# EAGLE board TopLayer1050 (EAGLE 7.2.0)
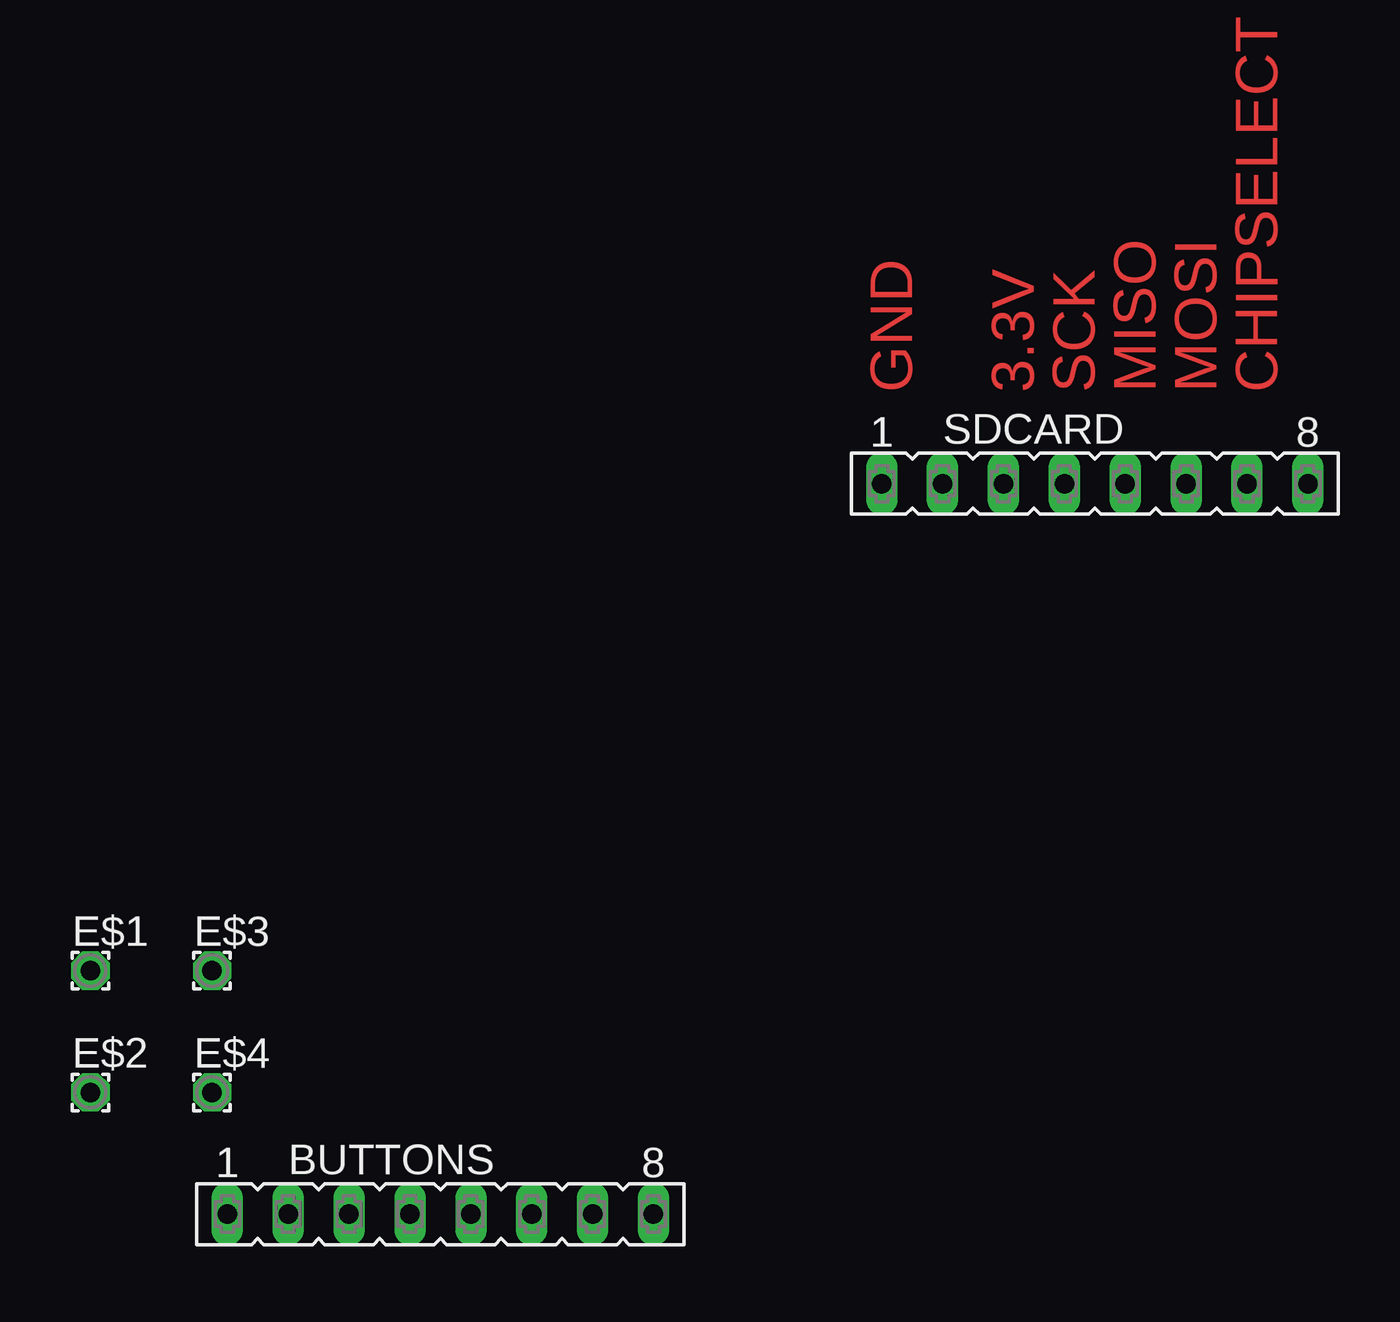
[diagram p0: board, top side]
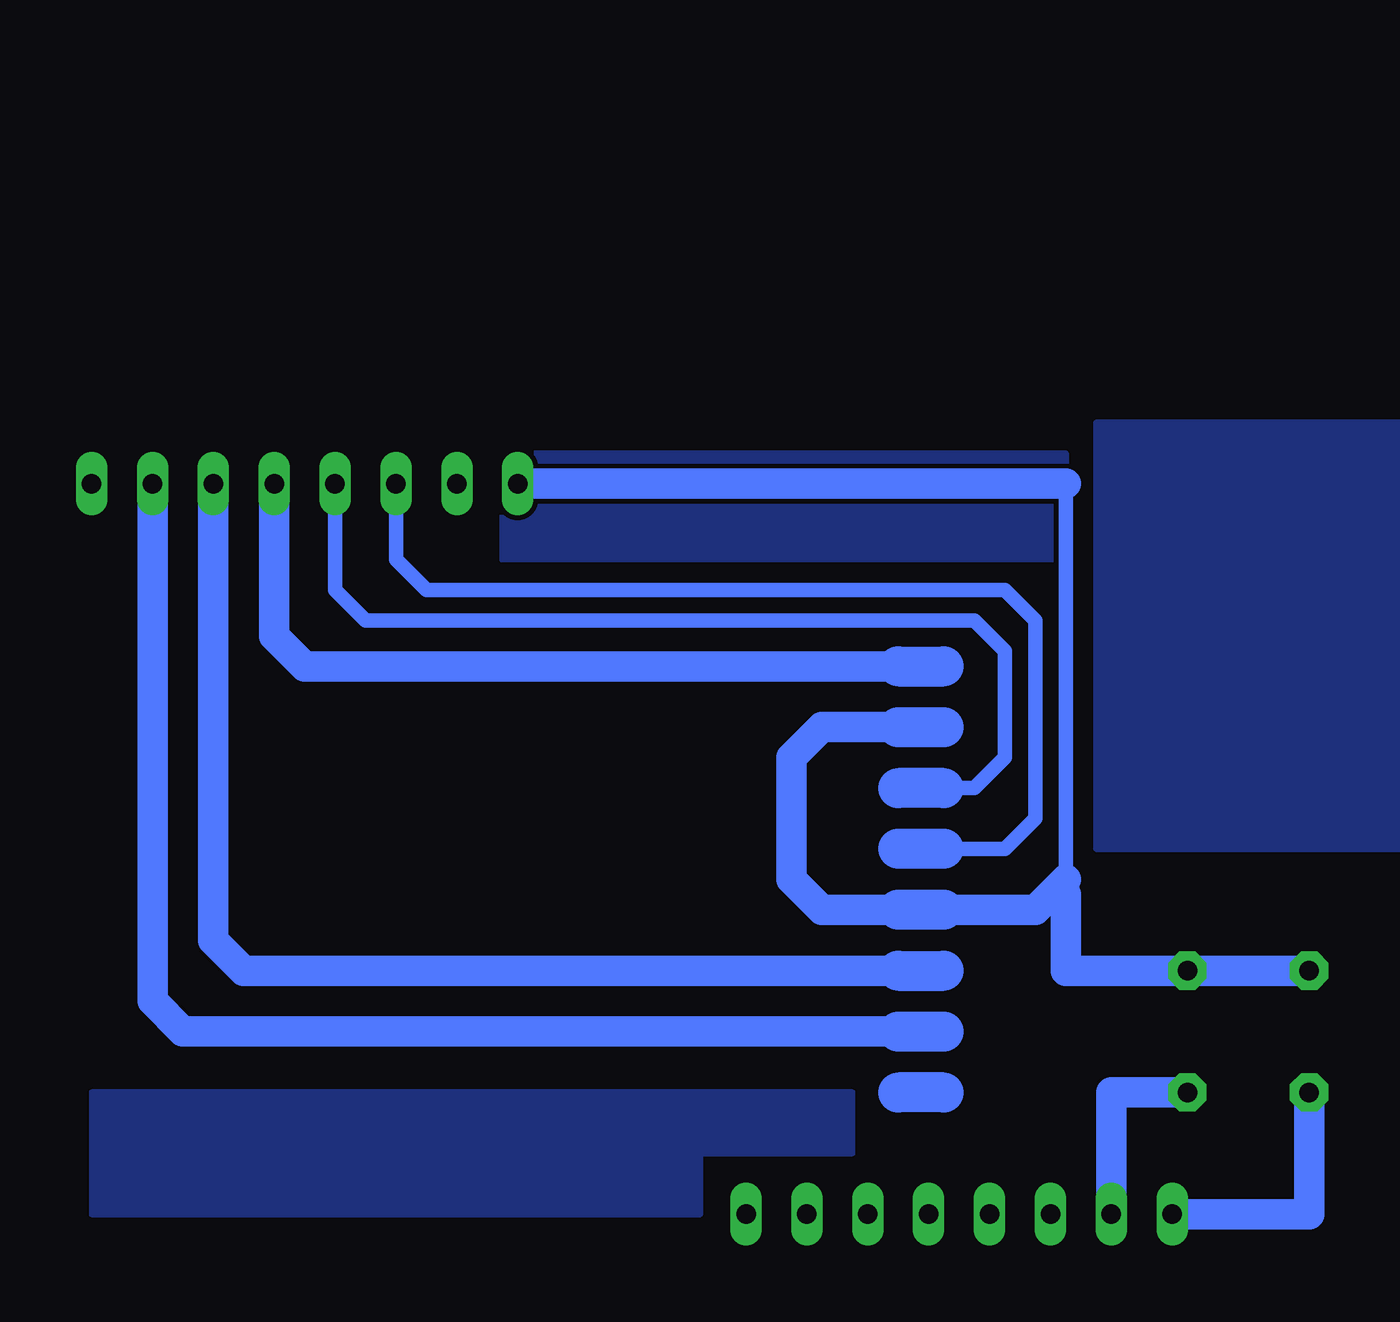
[diagram p1: board, bottom side, seen from below]

No outline drawn. Coordinates in mm, seen from the top.
Copper layers (1*16): Top 0.035mm / dielectric 1.5mm / Bottom 0.035mm
Design rules "default": minimum track width 10mil, minimum drill 24mil, track to track 8mil, track to pad 8mil, pad to pad 8mil, via to via 8mil, smd to smd 8mil, copper to edge 40mil, drill to drill 8mil, minimum pad ring 10mil, minimum via ring 8mil, stop-mask expansion 4mil, vias tented up to drill 0mil, thermal gap 10mil

## Footprints (pad centres in the part's own frame; a part is rotated, then mirrored left to right if it is on the bottom)
FE08 = drill 0.813 long: 1 -8.89,0; 2 -6.35,0; 3 -3.81,0; 4 -1.27,0; 5 1.27,0; 6 3.81,0; 7 6.35,0; 8 8.89,0
1,6/0,8 = drill 0.813 pad 1.6 octagon: 1 0,0

## Placement (x,y rotation side)
BUTTONS  [FE08]  19.68,2.54 0 top
E$1  [1,6/0,8]  5.08,12.7 0 top
E$2  [1,6/0,8]  5.08,7.62 0 top
E$3  [1,6/0,8]  10.16,12.7 0 top
E$4  [1,6/0,8]  10.16,7.62 0 top
SDCARD  [FE08]  46.99,33.02 0 top

## Library data of the parts
BUTTONS SDCARD = con-lsta
E$1-E$4 = wirepad

## Nets
S$1: SDCARD.7
S$3: BUTTONS.2 E$4.1
S$4: BUTTONS.1 E$2.1
S$10: SDCARD.6
S$11: SDCARD.5
S$12: SDCARD.4
S$13: SDCARD.3
S$15: E$1.1 E$3.1 SDCARD.1

## Tracks (layer width: path | path; a pad name or v marks a point on that pad's centre or on a via)
S$1
  Bottom 1.27: 22.23,10.16 52.07,10.16 53.34,11.43 SDCARD.7
  Bottom 1.676: 22.23,10.16 20.32,10.16
S$3
  Bottom 1.27: BUTTONS.2 13.34,7.62 E$4.1
S$4
  Bottom 1.27: BUTTONS.1 5.08,2.54 E$2.1
S$7
  Bottom 1.676: 20.32,7.62 22.23,7.62
S$10
  Bottom 1.27: 22.23,12.7 49.53,12.7 50.8,13.97 SDCARD.6
  Bottom 1.676: 22.23,12.7 20.32,12.7
S$11
  Bottom 1.27: SDCARD.5 48.26,26.67 46.99,25.4 22.23,25.4
  Bottom 1.676: 22.23,25.4 20.32,25.4
S$12
  Bottom 0.61: SDCARD.4 45.72,28.57 44.45,27.3 19.05,27.3 17.78,26.04 17.78,21.59 19.05,20.32 20.32,20.32
  Bottom 1.676: 20.32,20.32 22.23,20.32
S$13
  Bottom 0.61: SDCARD.3 43.18,29.84 41.91,28.57 17.78,28.57 16.51,27.3 16.51,19.05 17.78,17.78 20.32,17.78
  Bottom 1.676: 20.32,17.78 22.23,17.78
S$15
  Bottom 0.61: 15.24,33.02 15.24,16.51 15.24,15.88
  Bottom 1.27: SDCARD.1 15.24,33.02 | 15.24,16.51 16.51,15.24 20.32,15.24 | 22.23,22.86 25.4,22.86 26.67,21.59 26.67,16.51 25.4,15.24 22.23,15.24 | E$1.1 E$3.1 15.24,12.7 15.24,15.88
  Bottom 1.676: 20.32,15.24 22.23,15.24 | 22.23,22.86 20.32,22.86
S$16
  pour Bottom: 38.73,34.29 15.24,34.29 15.24,29.84 38.73,29.84
S$18
  pour Bottom: 24.13,7.62 55.88,7.62 55.88,6.99 55.88,2.54 30.48,2.54 30.48,5.08 24.77,5.08 24.13,5.08
S$19
  pour Bottom: 0,35.56 13.97,35.56 13.97,17.78 0,17.78

## Text on the board
Top: GND | 3.3V | SCK | MISO | MOSI | CHIPSELECT